# EAGLE board Servo--flex--mimic--hand (EAGLE 9.7.0)

Size 385.12 x 82.4 mm. Coordinates in mm from the lower left corner, seen from the top.
Outline: 0,0 385.12,0 385.12,82.4 0,82.4 0,0
Copper layers (1*16): Top 0.035mm / dielectric 1.5mm / Bottom 0.035mm
Design rules "default": minimum track width 6mil, minimum drill 0.35mm, track to track 6mil, track to pad 6mil, pad to pad 6mil, via to via 6mil, smd to smd 6mil, copper to edge 40mil, drill to drill 6mil, minimum pad ring 10mil, minimum via ring 8mil, stop-mask expansion 4mil, vias tented up to drill 0mil, thermal gap 10mil

## Footprints (pad centres in the part's own frame; a part is rotated, then mirrored left to right if it is on the bottom)
1X02 = drill 1.016 long: 1 -1.27,0; 2 1.27,0
RESAD1016W63L850D250B = drill 0.83 pad 1.43: 1 -5.08,0; 2 5.08,0
SG90 = drill 1.016 long: 1 -2.54,0; 2 0,0; 3 2.54,0
ARDUINO-UNO-R3-SHIELD = drill 1.016 pad 1.88: 3.3V 24.13,-2.54; 5V 24.13,0; A0 24.13,12.7; A1 24.13,15.24; A2 24.13,17.78; A3 24.13,20.32; A4 24.13,22.86; A5 24.13,25.4; AREF -24.13,-13.97; D2 -24.13,20.32; D3 -24.13,17.78; D4 -24.13,15.24; D5 -24.13,12.7; D6 -24.13,10.16; D7 -24.13,7.62; D8 -24.13,3.81; D9 -24.13,1.27; D10 -24.13,-1.27; D11 -24.13,-3.81; D12 -24.13,-6.35; D13 -24.13,-8.89; GND@0 24.13,2.54; GND@1 24.13,5.08; GND@2 -24.13,-11.43; IOREF 24.13,-7.62; NC 24.13,-10.16; RES 24.13,-5.08; RX -24.13,25.4; SCL -24.13,-19.05; SDA -24.13,-16.51; TX -24.13,22.86; VIN 24.13,7.62

## Placement (x,y rotation side)
R1  FLEX-SENSOR  [1X02]  7.6,67.78 0 top
R2  1k  [RESAD1016W63L850D250B]  41.89,42.39 90 top
R3  FLEX-SENSOR  [1X02]  25.38,67.78 0 top
R4  FLEX-SENSOR  [1X02]  43.16,67.78 0 top
R5  FLEX-SENSOR  [1X02]  60.94,67.78 0 top
R6  FLEX-SENSOR  [1X02]  78.72,67.78 0 top
R7  1k  [RESAD1016W63L850D250B]  6.33,42.39 90 top
R8  1k  [RESAD1016W63L850D250B]  59.67,42.39 90 top
R9  1k  [RESAD1016W63L850D250B]  77.45,42.39 90 top
R10  1k  [RESAD1016W63L850D250B]  24.11,42.39 90 top
SERVO1  SERVOSG90  [SG90]  292.96,63.69 0 top
SERVO2  SERVOSG90  [SG90]  314.32,62.78 0 top
SERVO3  SERVOSG90  [SG90]  335.57,62.18 0 top
SERVO4  SERVOSG90  [SG90]  357.08,62.34 0 top
SERVO5  SERVOSG90  [SG90]  378.13,62.5 0 top
U1  ARDUINO-UNO-R3-SHIELD  [ARDUINO-UNO-R3-SHIELD]  196.49,34.52 180 top

## Library data of the parts
R1-R10 SERVO1-SERVO5 U1 = Tinkercad

## Nets
U1_5V: R2.1 R7.1 R8.1 R9.1 R10.1 SERVO1.2 SERVO2.2 SERVO3.2 SERVO4.2 SERVO5.2 U1.5V
U1_A0: R1.1 R7.2 U1.A0
U1_A1: R3.1 R10.2 U1.A1
U1_A2: R2.2 R4.1 U1.A2
U1_A3: R5.1 R8.2 U1.A3
U1_A4: R6.1 R9.2 U1.A4
U1_D2: SERVO3.3 U1.D2
U1_D3: SERVO4.3 U1.D3
U1_D4: SERVO5.3 U1.D4
U1_GND: R1.2 R3.2 R4.2 R5.2 R6.2 SERVO1.1 SERVO2.1 SERVO3.1 SERVO4.1 SERVO5.1 U1.GND@0 U1.GND@1 U1.GND@2
U1_RX: SERVO1.3 U1.RX
U1_TX: SERVO2.3 U1.TX

## Tracks (layer width: path | path; a pad name or v marks a point on that pad's centre or on a via)
U1_5V  (10 unrouted)
U1_A0  (2 unrouted)
U1_A1  (2 unrouted)
U1_A2  (2 unrouted)
U1_A3  (2 unrouted)
U1_A4  (2 unrouted)
U1_D2  (1 unrouted)
U1_D3  (1 unrouted)
U1_D4  (1 unrouted)
U1_GND  (12 unrouted)
U1_RX  (1 unrouted)
U1_TX  (1 unrouted)